# EAGLE board megamini-R32 (EAGLE 6.2)
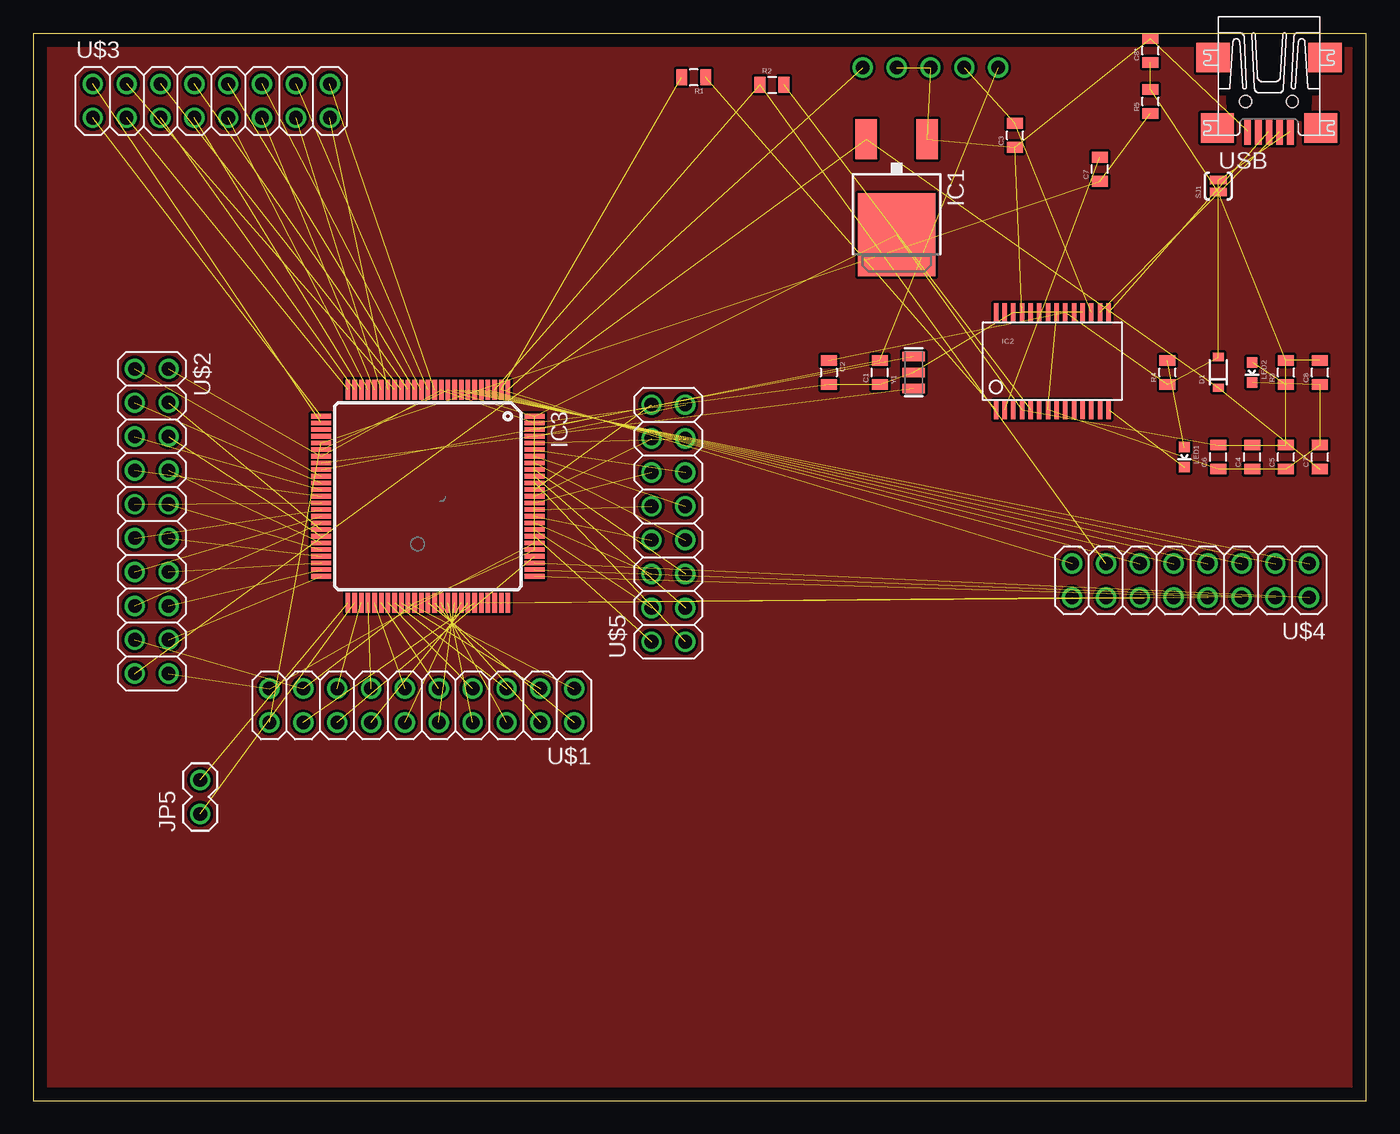
[diagram p0: board, top side]

Size 100 x 80 mm. Coordinates in mm from the lower left corner, seen from the top.
Outline: 0,0 100,0 100,80 0,80 0,0
Copper layers (1*16): Top 0.035mm / dielectric 1.5mm / Bottom 0.035mm
Design rules: minimum track width 10mil, minimum drill 24mil, track to track 8mil, track to pad 8mil, pad to pad 8mil, via to via 8mil, smd to smd 8mil, copper to edge 40mil, drill to drill 8mil, minimum pad ring 10mil, minimum via ring 8mil, stop-mask expansion 4mil, vias tented up to drill 0mil, thermal gap 10mil

## Footprints (pad centres in the part's own frame; a part is rotated, then mirrored left to right if it is on the bottom)
0805 = smd 0.8 x 1.2: 1 -0.9,0; 2 0.9,0
SOD-323 = smd 0.63 x 0.83: 1 -1.15,0; 2 1.15,0
DPACK = smd 1.6 x 3: 1 -2.28,-4.8; 3 2.28,-4.8 | smd 5.8 x 6.2: 4 0,2.38
SSOP28DB = smd 0.348 x 1.397: 1 -4.225,-3.656; 2 -3.575,-3.656; 3 -2.925,-3.656; 4 -2.275,-3.656; 5 -1.625,-3.656; 6 -0.975,-3.656; 7 -0.325,-3.656; 8 0.325,-3.656; 9 0.975,-3.656; 10 1.625,-3.656; 11 2.275,-3.656; 12 2.925,-3.656; 13 3.575,-3.656; 14 4.225,-3.656; 15 4.225,3.656; 16 3.575,3.656; 17 2.925,3.656; 18 2.275,3.656; 19 1.625,3.656; 20 0.975,3.656; 21 0.325,3.656; 22 -0.325,3.656; 23 -0.975,3.656; 24 -1.625,3.656; 25 -2.275,3.656; 26 -2.925,3.656; 27 -3.575,3.656; 28 -4.225,3.656
TQFP100 = smd 1.5 x 0.35: 1 -8,6; 2 -8,5.5; 3 -8,5; 4 -8,4.5; 5 -8,4; 6 -8,3.5; 7 -8,3; 8 -8,2.5; 9 -8,2; 10 -8,1.5; 11 -8,1; 12 -8,0.5; 13 -8,0; 14 -8,-0.5; 15 -8,-1; 16 -8,-1.5; 17 -8,-2; 18 -8,-2.5; 19 -8,-3; 20 -8,-3.5; 21 -8,-4; 22 -8,-4.5; 23 -8,-5; 24 -8,-5.5; 25 -8,-6; 51 8,-6; 52 8,-5.5; 53 8,-5; 54 8,-4.5; 55 8,-4; 56 8,-3.5; 57 8,-3; 58 8,-2.5; 59 8,-2; 60 8,-1.5; 61 8,-1; 62 8,-0.5; 63 8,0; 64 8,0.5; 65 8,1; 66 8,1.5; 67 8,2; 68 8,2.5; 69 8,3; 70 8,3.5; 71 8,4; 72 8,4.5; 73 8,5; 74 8,5.5; 75 8,6 | smd 0.35 x 1.5: 26 -6,-8; 27 -5.5,-8; 28 -5,-8; 29 -4.5,-8; 30 -4,-8; 31 -3.5,-8; 32 -3,-8; 33 -2.5,-8; 34 -2,-8; 35 -1.5,-8; 36 -1,-8; 37 -0.5,-8; 38 0,-8; 39 0.5,-8; 40 1,-8; 41 1.5,-8; 42 2,-8; 43 2.5,-8; 44 3,-8; 45 3.5,-8; 46 4,-8; 47 4.5,-8; 48 5,-8; 49 5.5,-8; 50 6,-8; 76 6,8; 77 5.5,8; 78 5,8; 79 4.5,8; 80 4,8; 81 3.5,8; 82 3,8; 83 2.5,8; 84 2,8; 85 1.5,8; 86 1,8; 87 0.5,8; 88 0,8; 89 -0.5,8; 90 -1,8; 91 -1.5,8; 92 -2,8; 93 -2.5,8; 94 -3,8; 95 -3.5,8; 96 -4,8; 97 -4.5,8; 98 -5,8; 99 -5.5,8; 100 -6,8
1X01NS = drill 1.016 pad 1.524: 1 0,0
1X02 = drill 1.016 pad 1.524: 1 0,0; 2 2.54,0
LED-0603 = smd 0.8 x 0.8: A 0,-0.75; C 0,0.75
SJ_2S-NO = smd 0.635 x 1.27: 1 -0.45,0; 2 0.45,0
2X10 = drill 1.016 pad 1.524: 1 -11.43,-1.27; 2 -11.43,1.27; 3 -8.89,-1.27; 4 -8.89,1.27; 5 -6.35,-1.27; 6 -6.35,1.27; 7 -3.81,-1.27; 8 -3.81,1.27; 9 -1.27,-1.27; 10 -1.27,1.27; 11 1.27,-1.27; 12 1.27,1.27; 13 3.81,-1.27; 14 3.81,1.27; 15 6.35,-1.27; 16 6.35,1.27; 17 8.89,-1.27; 18 8.89,1.27; 19 11.43,-1.27; 20 11.43,1.27
2X8_SMALL = drill 1.016 pad 1.524: 1 0,0; 2 0,2.54; 3 2.54,0; 4 2.54,2.54; 5 5.08,0; 6 5.08,2.54; 7 7.62,0; 8 7.62,2.54; 9 10.16,0; 10 10.16,2.54; 11 12.7,0; 12 12.7,2.54; 13 15.24,0; 14 15.24,2.54; 15 17.78,0; 16 17.78,2.54
UX60-MB-5ST = smd 2 x 0.5: 1 2.25,1.6; 2 2.25,0.8; 3 2.25,0; 4 2.25,-0.8; 5 2.25,-1.6 | smd 2.2 x 2.5: M1 -3.3,-4.2; M2 -3.3,4.2; M3 2,3.882; M4 2,-3.882 | hole 0.9: 0,-1.75; 0,1.75
RESONATOR-SMD = smd 0.7 x 1.7: 1 -1.2,0; 2 0,0; 3 1.2,0

## Placement (x,y rotation side)
C1  100nF  [0805]  63.5,54.61 90 top
C2  100nF  [0805]  59.69,54.61 270 top
C3  100nF  [0805]  73.66,72.39 90 top
C4  100nF  [0805]  91.44,48.26 90 top
C5  100nF  [0805]  93.98,48.26 90 top
C6  100nF  [0805]  88.9,48.26 90 top
C7  100nF  [0805]  80.01,69.85 90 top
C7*  10uF  [0805]  96.52,48.26 90 top
C8  100nF  [0805]  96.52,54.61 90 top
C8*  10uF  [0805]  83.82,78.74 90 top
D1  [SOD-323]  88.9,54.61 90 top
IC1  NCP1117-5.0  [DPACK]  64.77,67.31 180 top
IC2  FT232RLSSOP  [SSOP28DB]  76.45,55.46 0 top
IC3  ATMEGA2560-16AU  [TQFP100]  29.6,45.32 270 top
JP1  M01SMDNS  [1X01NS]  62.23,77.47 180 top
JP2  M01SMDNS  [1X01NS]  64.77,77.47 180 top
JP3  M01SMDNS  [1X01NS]  67.31,77.47 180 top
JP4  M01SMDNS  [1X01NS]  69.85,77.47 180 top
JP5  [1X02]  12.52,21.5 90 top
JP6  M01SMDNS  [1X01NS]  72.39,77.47 180 top
LED1  [LED-0603]  86.36,48.26 180 top
LED2  [LED-0603]  91.44,54.61 180 top
R1  [0805]  49.54,76.73 180 top
R2  [0805]  55.42,76.18 0 top
R3  [0805]  93.98,54.61 90 top
R4  [0805]  85.09,54.61 90 top
R5  10k  [0805]  83.82,74.93 90 top
SJ1  SOLDERJUMPERNO  [SJ_2S-NO]  88.9,68.58 90 top
U$1  M10X2  [2X10]  29.15,29.63 180 top
U$2  M10X2  [2X10]  8.88,43.45 270 top
U$3  M08X2  [2X8_SMALL]  4.46,73.71 0 top
U$4  M08X2  [2X8_SMALL]  95.72,40.27 180 top
U$5  M08X2  [2X8_SMALL]  48.92,34.41 90 top
USB  [UX60-MB-5ST]  92.71,74.93 270 top
Y1  RESONATORSMD  [RESONATOR-SMD]  66.04,54.61 90 top

## Library data of the parts
C1-C7 C7* C8 C8* D1 IC2 JP1-JP6 LED1 LED2 R1-R5 SJ1 U$1-U$5 Y1 = SparkFun
IC1 = v-reg
IC3 = atmel-2005
USB = con-hirose; OC_FARNELL: unknown; OC_NEWARK: unknown

## Nets
G0: IC3.51 JP5.2
G1: IC3.52 JP5.1
G2: IC3.70 U$1.18
GND: C1.1 C2.2 C3.1 C4.1 C5.1 C6.1 C7*.2 C8*.2 C8.1 IC1.1 IC2.7 IC2.18 IC2.21 IC2.25 IC2.26 IC3.11 IC3.32 IC3.62 IC3.81 IC3.99 JP2.1 JP3.1 LED2.C U$1.19 U$2.2 U$2.20 USB.5 Y1.2
N$1: IC2.16 USB.2
N$2: IC3.1 JP1.1
N$3: IC2.15 USB.3
N$4: C7.2 IC2.2
N$5: IC2.1 R1.1
N$6: IC2.5 R2.2
N$7: C3.2 IC2.17 JP4.1
N$8: IC3.33 Y1.1
N$9: IC3.34 Y1.3
N$10: LED2.A R3.1
N$11: LED1.A R4.2
N$12: IC2.14 LED1.C
N$13: C1.2 IC3.98 JP6.1
PA0: IC3.78 U$4.2
PA1: IC3.77 U$4.4
PA2: IC3.76 U$4.6
PA3: IC3.75 U$4.8
PA4: IC3.74 U$4.10
PA5: IC3.73 U$4.12
PA6: IC3.72 U$4.14
PA7: IC3.71 U$4.16
PB0: IC3.19 U$3.15
PB1: IC3.20 U$3.13
PB2: IC3.21 U$3.11
PB3: IC3.22 U$3.9
PB4: IC3.23 U$3.7
PB5: IC3.24 U$3.5
PB6: IC3.25 U$3.3
PB7: IC3.26 U$3.1
PC0: IC3.53 U$1.15
PC1: IC3.54 U$1.13
PC2: IC3.55 U$1.11
PC3: IC3.56 U$1.9
PC4: IC3.57 U$1.7
PC5: IC3.58 U$1.5
PC6: IC3.59 U$1.3
PC7: IC3.60 U$1.1
PD0: IC3.43 U$2.4
PD1: IC3.44 U$2.6
PD2: IC3.45 U$2.8
PD3: IC3.46 U$2.10
PD4: IC3.47 U$2.12
PD5: IC3.48 U$2.14
PD6: IC3.49 U$2.16
PD7: IC3.50 U$2.18
PE0: IC3.2 R1.2 U$4.15
PE1: IC3.3 R2.1 U$4.13
PE2: IC3.4 U$4.11
PE3: IC3.5 U$4.9
PE4: IC3.6 U$4.7
PE5: IC3.7 U$4.5
PE6: IC3.8 U$4.3
PE7: IC3.9 U$4.1
PF0: IC3.97 U$5.15
PF1: IC3.96 U$5.13
PF2: IC3.95 U$5.11
PF3: IC3.94 U$5.9
PF4: IC3.93 U$5.7
PF5: IC3.92 U$5.5
PF6: IC3.91 U$5.3
PF7: IC3.90 U$5.1
PH0: IC3.12 U$3.16
PH1: IC3.13 U$3.14
PH2: IC3.14 U$3.12
PH3: IC3.15 U$3.10
PH4: IC3.16 U$3.8
PH5: IC3.17 U$3.6
PH6: IC3.18 U$3.4
PH7: IC3.27 U$3.2
PJ0: IC3.63 U$1.2
PJ1: IC3.64 U$1.4
PJ2: IC3.65 U$1.6
PJ3: IC3.66 U$1.8
PJ4: IC3.67 U$1.10
PJ5: IC3.68 U$1.12
PJ6: IC3.69 U$1.14
PJ7: IC3.79 U$1.16
PK0: IC3.89 U$5.16
PK1: IC3.88 U$5.14
PK2: IC3.87 U$5.12
PK3: IC3.86 U$5.10
PK4: IC3.85 U$5.8
PK5: IC3.84 U$5.6
PK6: IC3.83 U$5.4
PK7: IC3.82 U$5.2
PL0: IC3.35 U$2.1
PL1: IC3.36 U$2.3
PL2: IC3.37 U$2.5
PL3: IC3.38 U$2.7
PL4: IC3.39 U$2.9
PL5: IC3.40 U$2.11
PL6: IC3.41 U$2.13
PL7: IC3.42 U$2.15
RESET: C7.1 IC3.30 R5.1 U$1.20
USB5V: C2.1 D1.2 IC2.20 R4.1 SJ1.2 USB.1
VCC: C4.2 C5.2 C6.2 C8*.1 C8.2 IC1.4 IC2.4 IC3.10 IC3.31 IC3.61 IC3.80 IC3.100 R3.2 R5.2 SJ1.1 U$1.17 U$2.17
VIN: C7*.1 D1.1 IC1.3 U$2.19

## Tracks (layer width: path | path; a pad name or v marks a point on that pad's centre or on a via)
G0  (1 unrouted)
G1  (1 unrouted)
G2  (1 unrouted)
GND  (27 unrouted)
N$1  (1 unrouted)
N$2  (1 unrouted)
N$3  (1 unrouted)
N$4  (1 unrouted)
N$5  (1 unrouted)
N$6  (1 unrouted)
N$7  (2 unrouted)
N$8  (1 unrouted)
N$9  (1 unrouted)
N$10  (1 unrouted)
N$11  (1 unrouted)
N$12  (1 unrouted)
N$13  (2 unrouted)
N$14
  pour Top: 0,80.01 99.69,80.01 99.69,0 0,0
PA0  (1 unrouted)
PA1  (1 unrouted)
PA2  (1 unrouted)
PA3  (1 unrouted)
PA4  (1 unrouted)
PA5  (1 unrouted)
PA6  (1 unrouted)
PA7  (1 unrouted)
PB0  (1 unrouted)
PB1  (1 unrouted)
PB2  (1 unrouted)
PB3  (1 unrouted)
PB4  (1 unrouted)
PB5  (1 unrouted)
PB6  (1 unrouted)
PB7  (1 unrouted)
PC0  (1 unrouted)
PC1  (1 unrouted)
PC2  (1 unrouted)
PC3  (1 unrouted)
PC4  (1 unrouted)
PC5  (1 unrouted)
PC6  (1 unrouted)
PC7  (1 unrouted)
PD0  (1 unrouted)
PD1  (1 unrouted)
PD2  (1 unrouted)
PD3  (1 unrouted)
PD4  (1 unrouted)
PD5  (1 unrouted)
PD6  (1 unrouted)
PD7  (1 unrouted)
PE0  (2 unrouted)
PE1  (2 unrouted)
PE2  (1 unrouted)
PE3  (1 unrouted)
PE4  (1 unrouted)
PE5  (1 unrouted)
PE6  (1 unrouted)
PE7  (1 unrouted)
PF0  (1 unrouted)
PF1  (1 unrouted)
PF2  (1 unrouted)
PF3  (1 unrouted)
PF4  (1 unrouted)
PF5  (1 unrouted)
PF6  (1 unrouted)
PF7  (1 unrouted)
PH0  (1 unrouted)
PH1  (1 unrouted)
PH2  (1 unrouted)
PH3  (1 unrouted)
PH4  (1 unrouted)
PH5  (1 unrouted)
PH6  (1 unrouted)
PH7  (1 unrouted)
PJ0  (1 unrouted)
PJ1  (1 unrouted)
PJ2  (1 unrouted)
PJ3  (1 unrouted)
PJ4  (1 unrouted)
PJ5  (1 unrouted)
PJ6  (1 unrouted)
PJ7  (1 unrouted)
PK0  (1 unrouted)
PK1  (1 unrouted)
PK2  (1 unrouted)
PK3  (1 unrouted)
PK4  (1 unrouted)
PK5  (1 unrouted)
PK6  (1 unrouted)
PK7  (1 unrouted)
PL0  (1 unrouted)
PL1  (1 unrouted)
PL2  (1 unrouted)
PL3  (1 unrouted)
PL4  (1 unrouted)
PL5  (1 unrouted)
PL6  (1 unrouted)
PL7  (1 unrouted)
RESET  (3 unrouted)
USB5V  (5 unrouted)
VCC  (16 unrouted)
VIN  (3 unrouted)